# Altium PCB KL25_2.PcbDoc
Units mm, origin at the board's own origin, x right, y up, seen from the top; angles counter-clockwise.
Board outline 152.4 x 101.6 mm, 2 copper layers (Top Layer, Bottom Layer); 50 components, 86 nets, 226 pads, 32 vias.
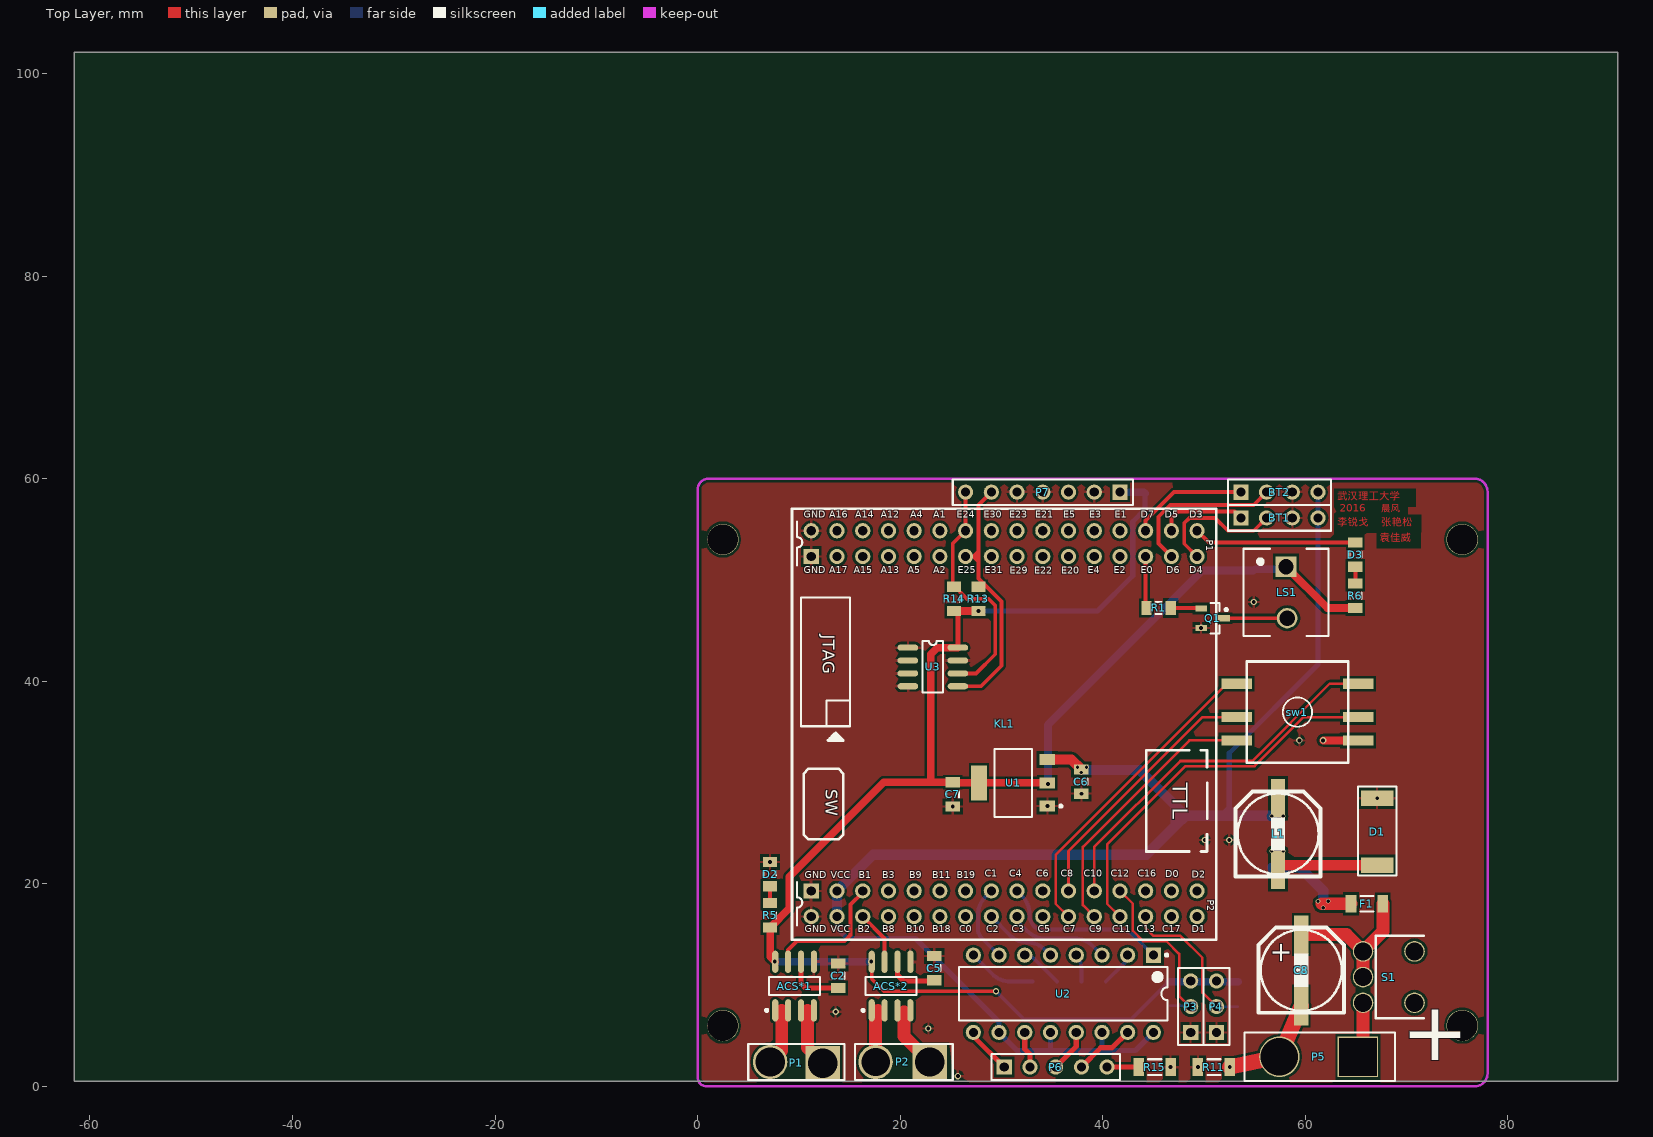
[diagram p0: Top Layer view]
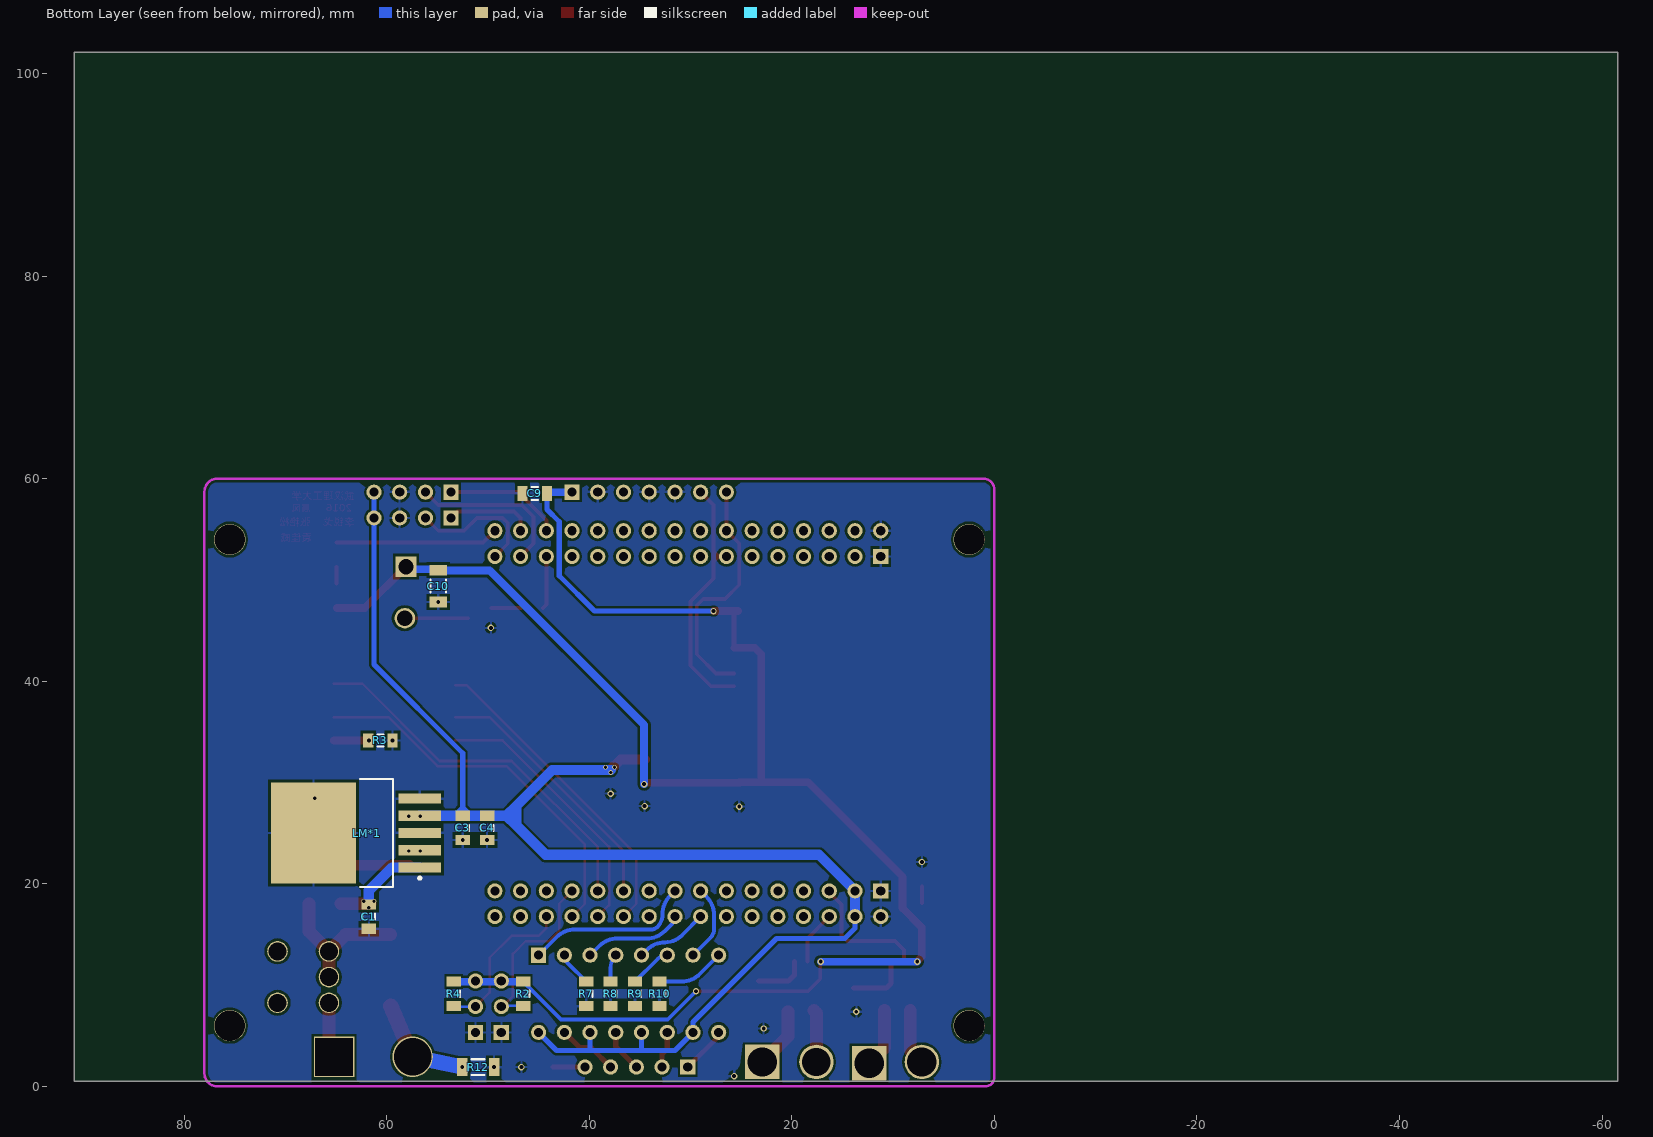
[diagram p1: Bottom Layer view, seen from below]

## Layer stack, top to bottom
Top Layer: signal copper 0.0356
Dielectric: dielectric 0.32, FR-4, Dk 4.8
Bottom Layer: signal copper 0.0356

## Board outline
-61.548,0.508 90.852,0.508 90.852,102.108 -61.548,102.108

## Design rules (kind name [scope] priority, off if disabled: settings)
Clearance [All] p1: gap=0.254
PolygonConnect [All] p1: connectstyle=Relief reliefconductorwidth=0.254 reliefentries=4 polygonreliefangle="90 Angle" airgapwidth=0.254
RoutingVias [All] p1: holewidth=0.711 width=1.27 viastyle="Through Hole" minholewidth=0.711 minwidth=1.27 maxholewidth=0.711 maxwidth=1.27
SolderMaskExpansion [All] p1: expansion=0.102
Width [All] p1: maxlimit=1.524 minlimit=0.152 preferedwidth=1.016 minimp=50.000000 maximp=50.000000 favimp=50.000000
28 further rules are at their usual default settings.

## Components (designator, comment, footprint, x,y, rotation, side; value= is the part's Value field where it differs from the comment)
ACS*1 "ACS712 AMPSENSOR" "SOIC1-8N ACS712" 9.572,9.906 r90 top
ACS*2 "ACS712 AMPSENSOR" "SOIC1-8N ACS712" 19.097,9.906 r90 top
BT1 "Header 4" HDR1X4 53.641,56.134 r0 top
BT2 "Header 4" HDR1X4 53.641,58.674 r0 top
C1 "Cap" C2012 61.769,16.764 r90 bottom
C2 "Cap" C2012 13.89,10.922 r270 top
C3 "Cap" C2012 52.498,25.527 r90 bottom
C4 "Cap" C2012 50.085,25.527 r90 bottom
C5 "Cap" C2012 23.368,11.684 r270 top
C6 "Cap" C2012 37.893,30.099 r90 top
C7 "Cap" C2012 25.193,28.829 r90 top
C8 "Cap Pol1" SMD-EC-F8 59.61,14.986 r270 top
C9 "100nF" C2012 45.386,58.547 r180 bottom
C10 "Cap Pol1" 1206(2) 54.911,49.403 r270 bottom
D1 "1SS355" SK54 67.103,25.146 r270 top
D2 "POWER" R2012 7.159,20.955 r90 top
D3 "POWER" R2012 64.944,52.508 r90 top
F1 "1.5A" 1206(2) 66.087,18.034 r0 top
KL1 "KL25Z系统板 V2.0" "KL25 V2.0系统板" 29.638,37.592 r270 top
L1 "33uH" SMD-EC-F8 57.324,28.448 r270 top
LM*1 "lm2596" lm2596 63.039,25.019 r0 bottom
LS1 "Buzzer" ABSM-1574 58.34,53.975 r270 top
P1 "Header 2" HDR1X2#1 10.715,2.54 r180 top
P2 "Header 2" HDR1X2#2 21.51,2.54 r180 top
P3 "Header 3" HDR1X3 48.688,5.334 r90 top
P4 "Header 3" HDR1X3 51.228,5.334 r90 top
P5 "Header 2" HDR1X2#3 62.785,2.921 r180 top
P6 "Header 5" HDR1X5 30.273,1.905 r0 top
P7 "Header 7" HDR1X7 41.703,58.674 r180 top
Q1 "QNPN" SOT23_N 50.847,46.228 r0 top
R1 "Res2" R2012 45.513,47.244 r180 top
R2 "Res2" R2012 46.529,9.144 r270 bottom
R3 "10k" R2012 60.626,34.163 r0 bottom
R4 "Res2" R2012 53.387,9.144 r270 bottom
R5 "2K" R2012 7.159,16.891 r270 top
R6 "2K" R2012 64.944,48.444 r270 top
R7 "Res2" R2012 40.306,9.144 r270 bottom
R8 "Res2" R2012 37.893,9.144 r270 bottom
R9 "Res2" R2012 35.48,9.144 r270 bottom
R10 "Res2" R2012 33.067,9.144 r270 bottom
R11 "Res2" 1206(2) 50.974,1.905 r0 top
R12 "Res2" 1206(2) 50.974,1.905 r0 bottom
R13 "Res2" R2012 27.733,48.133 r270 top
R14 "Res2" R2012 25.32,48.133 r270 top
R15 "Res2" 1206(2) 45.132,1.905 r180 top
S1 "small switch" "small switch" 65.706,13.335 r0 top
sw1 "SW-5" SW-5 59.229,36.957 r0 top
U1 "REG1117" SOT223 31.162,29.972 r90 top
U2 "TLP521-4" DIP-16 36.115,9.144 r270 top
U3 "AT24C02" IR2104 23.161,41.021 r90 top

## Footprints (in the part's own frame and the unit in brackets; to place one, negate y for a bottom-side part, rotate by r counter-clockwise, add the part's x,y. Pads: shape width x height; smd on the part's side, far side on the other; paste and mask are expansions set on the pad)
1206(2) [mm]
  rect 1.05x1.75 smd: 1(-1.575,0) 2(1.575,0)
  silkscreen extent -0.65,-0.77 0.65,0.77, body extent -1.6,-0.8 1.6,0.8, height 1.6
ABSM-1574 [mil] "Magnetic Transducer Buzzer"
  rect 80x80 hole 60: 1A(104.33,-9.45)
  round 80 hole 60: 2A(305,-5)
  silkscreen extent 35,-175 375,155
C2012 [mm] "Chip Capacitor, 2-Leads, Body 2.0x1.2mm, IPC Low Density"
  rect 1x1.45 smd: 1(-1.2,0) 2(1.2,0)
  silkscreen extent -0.3,-0.63 0.3,0.63, body extent -0.98,-0.6 1.02,0.6, height 0.5
DIP-16 [mm] "DIP; 16 Leads; Row Spacing 7.62 mm; Pitch 2.54 mm"
  rect 1.5x1.5 hole 0.9: 1(-3.81,8.89)
  round 1.5 hole 0.9: 2(-3.81,6.35) 3(-3.81,3.81) 4(-3.81,1.27) 5(-3.81,-1.27) 6(-3.81,-3.81) 7(-3.81,-6.35) 8(-3.81,-8.89) 9(3.81,-8.89) 10(3.81,-6.35) 11(3.81,-3.81) 12(3.81,-1.27) 13(3.81,1.27) 14(3.81,3.81) 15(3.81,6.35) 16(3.81,8.89)
  silkscreen extent -3.93,-10.3 2.65,10.32, body extent -3.6,-10.28 3.6,10.28, height 5.08
HDR1X2#1 [mm] "Connector; Header; 2 Position"
  rect 3.4x3.4 hole 2.9: 1(-1.651,0.254)
  round 3.4 hole 2.9: 2(3.556,0.127)
  silkscreen extent -3.81,-1.65 5.71,1.91
HDR1X2#2 [mm] "Connector; Header; 2 Position"
  rect 3.4x3.4 hole 2.9: 1(-1.397,0.127)
  round 3.4 hole 2.8: 2(3.937,0.127)
  silkscreen extent -3.68,-1.65 5.97,1.91
HDR1X2#3 [mm] "Connector; Header; 2 Position"
  rect 4x4 hole 3.7 square: 1(-2.413,0)
  round 4 hole 3.7: 2(5.334,0)
  silkscreen extent -6.1,-2.41 8.76,2.41
HDR1X3 [mm] "Connector; Header; 3 Position"
  rect 1.5x1.5 hole 0.9: 1(0,0)
  round 1.5 hole 0.9: 2(2.54,0) 3(5.08,0)
  silkscreen extent -1.27,-1.27 6.35,1.27, body extent -1.27,-1.27 6.35,1.27, height 7.58
HDR1X4 [mm] "Connector; Header; 4 Position"
  rect 1.5x1.5 hole 0.9: 1(0,0)
  round 1.5 hole 0.9: 2(2.54,0) 3(5.08,0) 4(7.62,0)
  silkscreen extent -1.27,-1.27 8.89,1.27
HDR1X5 [mm] "Connector; Header; 5 Position"
  rect 1.5x1.5 hole 0.9: 1(0,0)
  round 1.5 hole 0.9: 2(2.54,0) 3(5.08,0) 4(7.62,0) 5(10.16,0)
  silkscreen extent -1.27,-1.27 11.43,1.27, body extent -1.27,-1.27 11.43,1.27, height 7.58
HDR1X7 [mm] "Connector; Header; 7 Position"
  rect 1.5x1.5 hole 0.9: 1(0,0)
  round 1.5 hole 0.9: 2(2.54,0) 3(5.08,0) 4(7.62,0) 5(10.16,0) 6(12.7,0) 7(15.24,0)
  silkscreen extent -1.27,-1.27 16.51,1.27
IR2104 [mm]
  oval 0.6x2.032 smd: 1(2.298,2.394) 2(1.028,2.394) 3(-0.242,2.394) 4(-1.512,2.394) 5(-1.512,-2.534) 6(-0.242,-2.534) 7(1.028,-2.534) 8(2.298,-2.534)
  silkscreen extent -2.11,-1.09 2.94,0.95
"KL25 V2.0系统板" [mm]
  rect 1.5x1.5 hole 0.9: 101(-14.732,-18.415) 201(18.288,-18.415)
  round 1.5 hole 0.9: 102(-17.272,-18.415) 103(-14.732,-15.875) 104(-17.272,-15.875) 105(-14.732,-13.335) 106(-17.272,-13.335) 107(-14.732,-10.795) 108(-17.272,-10.795) 109(-14.732,-8.255) 110(-17.272,-8.255) 111(-14.732,-5.715) 112(-17.272,-5.715) 113(-14.732,-3.175) 114(-17.272,-3.175) 115(-14.732,-0.635) 116(-17.272,-0.635) 117(-14.732,1.905) 118(-17.272,1.905) 119(-14.732,4.445) 120(-17.272,4.445) 121(-14.732,6.985) 122(-17.272,6.985) 123(-14.732,9.525) 124(-17.272,9.525) 125(-14.732,12.065) 126(-17.272,12.065) 127(-14.732,14.605) 128(-17.272,14.605) 129(-14.732,17.145) 130(-17.272,17.145) 131(-14.732,19.685) 132(-17.272,19.685) 202(20.828,-18.415) 203(18.288,-15.875) 204(20.828,-15.875) 205(18.288,-13.335) 206(20.828,-13.335) 207(18.288,-10.795) 208(20.828,-10.795) 209(18.288,-8.255) 210(20.828,-8.255) 211(18.288,-5.715) 212(20.828,-5.715) 213(18.288,-3.175) 214(20.828,-3.175) 215(18.288,-0.635) 216(20.828,-0.635) 217(18.288,1.905) 218(20.828,1.905) 219(18.288,4.445) 220(20.828,4.445) 221(18.288,6.985) 222(20.828,6.985) 223(18.288,9.525) 224(20.828,9.525) 225(18.288,12.065) 226(20.828,12.065) 227(18.288,14.605) 228(20.828,14.605) 229(18.288,17.145) 230(20.828,17.145) 231(18.288,19.685) 232(20.828,19.685)
  silkscreen extent -19.43,-20.32 23.11,21.59
lm2596 [mm]
  rect 4.2x1 smd: 1(-6.3,3.4) 2(-6.3,1.7) 3(-6.3,0) 4(-6.3,-1.7) 5(-6.3,-3.4)
  rect 8.4x10 smd: 6(4.2,0)
  silkscreen extent -6.42,-5.35 -0.4,5.35, body extent -3.65,-5.32 6,5.33, height 4.83
R2012 [mm] "Chip Resistor, 2-Leads, Body 2.0x1.2mm, IPC Low Density"
  rect 1x1.4 smd: 1(-1.2,0) 2(1.2,0)
  silkscreen extent -0.3,-0.6 0.3,0.6, body extent -0.98,-0.6 1.02,0.6, height 0.5
SK54 [mm]
  rect 1.52x3.18 smd: 1(-3.305,0) 2(3.305,0)
  silkscreen extent -4.44,-1.91 4.32,1.91
"small switch" [mil]
  round 80 hole 70: 0(200,-200) 0(200,0) 1(0,0) 2(0,-100) 3(0,-200)
  silkscreen extent 50,-260 235,60
SMD-EC-F8 [mm]
  rect 3.8x1.4 smd: 1(0,0) 2(7.051,0)
  silkscreen extent -0.69,-4.22 7.71,4.2
"SOIC1-8N ACS712" [mm]
  oval 2.2x0.6 smd: 1(-2.4,1.905) 2(-2.4,0.635) 3(-2.4,-0.635) 4(-2.4,-1.905) 5(2.4,-1.905) 6(2.4,-0.635) 7(2.4,0.635) 8(2.4,1.905)
  silkscreen extent -2.52,-2.5 0.9,2.88, body extent -2,-2.5 2,2.5, height 1.75
SOT23_N [mm] "SOT23, 3-Leads, Body 2.9x1.3mm, Pitch 0.95mm, Lead Span 2.3mm - Reverse Pinning, IPC Medium Density"
  rect 1.15x0.6 smd: 1(1.125,0) 2(-1.125,-0.95) 3(-1.125,0.95)
  silkscreen extent -0.2,-1.5 1.48,1.5, body extent -0.7,-1.5 0.7,1.5, height 1.1
SOT223 [mm] "SOT-223/SC-73; 4 Leads; Body 6.7 x 7.3 mm, inc. leads (LxW max)"
  rect 1.1x1.55 smd: 1(-2.3,-3.375) 2(0,-3.375) 3(2.3,-3.375)
  rect 3.45x1.55 smd: 4(0,3.375)
  silkscreen extent -3.35,-4.83 3.35,1.85, body extent -3.25,-3.47 3.25,3.49, height 1.66
SW-5 [mm]
  rect 3x1 smd: 1(-6,2.8) 2(-6,-0.5) 3(-6,-2.8) 4(6,-2.8) 5(6,-0.5) 6(6,2.8)
  silkscreen extent -5,-5 5,5

## Part data
BT1 BT2: "Header, 4-Pin"
C1 C3 C4: "Capacitor"
C2 C5 C6 C7: "贴片电容"
C8 C10: "Polarized Capacitor (Radial)"
C9: library part Cap, "Capacitor"
D1: library part "Diode 1N4148", "High Conductance Fast Diode"
D2 D3: library part LED, "Typical INFRARED GaAs LED"
F1: library part "Fuse 1", "Fuse"
L1: library part Inductor, "Inductor"
LS1: "Magnetic Transducer Buzzer"
P1 P2 P5: "Header, 2-Pin"
P3 P4: "Header, 3-Pin"
P6: "Header, 5-Pin"
P7: "Header, 7-Pin"
Q1: "NPN Bipolar Transistor"
R1 R2 R4 R7 R8 R9 R10 R11 R12 R13 R14 R15: "Resistor"
R3: library part Res, "Resistor of led"
R5 R6: library part Res, "Resistor"
U1: "800mA and 1A Low Dropout Positive Regulator 2.85V, 3.3V, 5V, and Adjustable"

## Free pads (board coordinates)
  round 3.1 hole 3: 4(2.5,54) 5(2.5,6) 6(75.5,54) 7(75.5,6)

## Via types
v1: diameter 0.635, hole 0.381, Top Layer to Bottom Layer, 22 vias
v2: diameter 0.457, hole 0.33, Top Layer to Bottom Layer, 10 vias

## Nets (pads, with @x,y where several pads share a name; then routed paths per layer and width w, separated by ;. In a path a pad name is that pad's centre, name@x,y a point inside that pad or via, vN(x,y) a via of type N, cw(c..) or ccw(c..) an arc to the next point about the centre after c; other vN are vias at no path point)
3.3V: ACS*1.8 ACS*2.8 C7.2 C9.2 C10.1 LS1.1A P3.3 P4.3 P7.1 R2.1 R4.1 R5.2 R6.2 R13.2 R14.2 U1.2 U1.4 U3.8 | length 182.6
  Top Layer w0.381: ACS*2.8 17.192,10.621 18.415,9.398 v1(29.464,9.398)
  Top Layer w0.508: U3.8 R14.2@25.695,46.558
  Top Layer w0.762: ACS*1.8 7.159,12.814 R5.2 9.064,17.596 9.064,20.701 18.392,30.029 C7.2 C7.2@25.079,30.029 ; 23.034,30.029 23.034,42.672 23.681,43.319 U3.8 ; C7.2@25.066,30.042 C7.2@25.079,30.029 ; R14.2 v1(27.733,46.933) ; U1.2 U1.4 25.136,29.972 C7.2@25.079,30.029 ; LS1.1A 62.181,47.244 R6.2
  Bottom Layer w0.381: v1(29.464,9.398) 32.258,6.604 42.789,6.604 R2.1
  Bottom Layer w0.508: v1(27.733,46.933) 39.487,46.933 42.973,50.419 42.973,55.753 44.186,56.966 C9.2
  Bottom Layer w0.762: v1(7.62,12.319) v1(17.145,12.319) ; v1(34.591,29.845) 34.591,35.687 49.843,50.939 54.872,50.939 C10.1 ; P7.1 44.059,58.674 C9.2 ; R2.1 R4.1 ; C10.1@55.131,51.071 LS1.1A@57.973,51.071
5V: BT1.4 BT2.4 C3.2 C4.2 C6.2 KL1.203 KL1.204 L1.1 LM*1.4 U1.3 U2.10 U2.12 U2.14 U2.16 | length 146.3
  Top Layer w1.016: U1.3 36.92,32.272 C6.2
  Bottom Layer w0.508: KL1.204 13.763,15.621 14.779,14.605 21.51,14.605 29.765,6.35 U2.10 31.543,3.556 43.227,3.556 U2.16 ; 34.845,3.683 U2.12 ; 39.925,3.683 U2.14 ; 51.658,26.719 52.498,27.559 ; C3.2 52.498,27.559 ; 53.338,26.719 52.498,27.559 ; BT2.4 BT1.4 61.261,41.656 52.498,32.893 52.498,27.559
  Bottom Layer w1.016: KL1.204 KL1.203 17.319,22.86 44.313,22.86 47.221,25.768 ; 37.893,31.242 43.665,31.242 47.221,27.686 ; 48.315,26.719 51.658,26.719 53.338,26.719 LM*1.4 ; 47.221,25.768 48.18,26.727 47.221,27.686 ; 47.221,25.768 47.221,27.686
  other v2: 56.689,26.67 57.832,26.67 37.893,30.988 37.512,31.496 38.401,31.496
12V: C1.2 F1.1 LM*1.1 | length 10.2
  Top Layer w1.27: 61.642,18.034 F1.1
  Bottom Layer w1.016: LM*1.1 59.454,21.619 61.769,19.304 C1.2
  other v2: 61.769,17.653 61.261,18.288 62.277,18.288
ADC1: KL1.121
ADC2: KL1.120
ADC3: KL1.119
ADC4: KL1.118
ADC5: ACS*1.7 KL1.205 | length 12.8
  Top Layer w0.381: ACS*1.7 8.937,13.462 9.826,14.351 14.525,14.351 15.108,14.934 15.108,17.959 16.303,19.153 KL1.205
ADC6: ACS*2.7 KL1.206 | length 5.4
  Top Layer w0.381: KL1.206 18.462,14.605 ACS*2.7
ADC7: KL1.207
"BT RXD": BT1.1 KL1.130 | length 8.7
  Top Layer w0.381: KL1.130 46.783,56.134 47.418,56.769 53.006,56.769 BT1.1
"BT TXD": BT1.2 KL1.131 | length 13.3
  Top Layer w0.381: KL1.131 49.323,52.308 48.053,53.578 48.053,55.626 48.561,56.134 51.101,56.134 52.371,54.864 54.911,54.864 BT1.2
BZ: KL1.127 R1.2 | length 5.2
  Top Layer w0.381: KL1.127 44.243,47.568 R1.2@44.567,47.244
EGND: C8.2 P5.2 R11.2 R12.2 | length 15.5
  Top Layer w1.524: v1(52.549,1.905) P5.2 C8.2
  Bottom Layer w1.524: v1(52.549,1.905) P5.2
GND: ACS*1.5 ACS*2.5 BT1.3 BT2.3 C1.1 C2.1 C3.1 C4.1 C5.1 C6.1 C7.1 C9.1 C10.2 D1.1 D2.2 KL1.101 KL1.102 KL1.201 KL1.202 LM*1.3 LM*1.5 LM*1.6 P3.1 P4.1 P7.2 P7.4 P7.5 Q1.2 R3.1 R7.2 R8.2 R9.2 R10.2 R11.1 R12.1 R15.1 U1.1 U3.1 U3.2 U3.3 U3.4 U3.7
  other v1: 25.701,1.016 46.707,1.905 49.399,1.905 22.78,5.715 13.636,7.366 7.159,22.155 50.085,24.327 52.498,24.327 25.193,27.629 34.537,27.672 67.103,28.451 37.893,28.899 59.426,34.163 49.722,45.278 54.911,47.828
I2C0_SCL: KL1.114 P7.7 R14.1 U3.6 | length 24
  Top Layer w0.381: U3.6 27.491,40.779 29.384,42.672 29.384,47.498 28.749,48.133 26.59,48.133 25.193,49.53 25.193,53.594 KL1.114 P7.7
I2C0_SDA: KL1.113 P7.6 R13.1 U3.5 | length 26.5
  Top Layer w0.381: U3.5 27.999,39.509 30.019,41.529 30.019,47.879 27.733,50.165 27.733,51.816 ; KL1.113 27.225,52.324 ; P7.6 27.733,57.404 27.733,52.832 ; 27.225,52.324 27.733,51.816 ; 27.225,52.324 27.733,52.324 ; 27.225,52.324 27.733,52.832 ; 27.733,51.816 27.733,52.324 ; 27.733,52.324 27.733,52.832
KEY0: KL1.222 sw1.1 | length 31.4
  Top Layer w0.254: KL1.222 35.353,18.034 35.353,22.86 52.086,39.593 sw1.1@53.229,39.593
KEY1: KL1.221 sw1.2 | length 26
  Top Layer w0.254: KL1.221 36.623,23.241 49.839,36.457 sw1.2
KEY2: KL1.224 sw1.3 | length 26.9
  Top Layer w0.254: KL1.224 38.032,17.895 38.032,23.634 48.555,34.157 sw1.3
KEY3: KL1.226 sw1.5 | length 37.6
  Top Layer w0.254: KL1.226 40.433,18.034 40.433,23.876 48.18,31.623 54.994,31.623 59.828,36.457 sw1.5
KEY4: KL1.223 sw1.6 | length 37.1
  Top Layer w0.254: KL1.223 39.163,23.622 47.672,32.131 54.784,32.131 62.41,39.757 sw1.6
LED: D3.2 KL1.132 | length 16.1
  Top Layer w0.381: KL1.132 50.479,53.708 D3.2
MOTOR1: P6.4 U2.15 | length 6
  Top Layer w0.508: P6.4 39.798,3.81 40.917,3.81 42.441,5.334 U2.15
MOTOR2: P6.3 U2.13 | length 4.3
  Top Layer w0.508: P6.3 37.385,3.937 U2.13
MOTOR3: P6.2 U2.11 | length 3.6
  Top Layer w0.508: U2.11 32.305,3.683 32.813,3.175 P6.2
MOTOR4: P6.1 U2.9 | length 4.7
  Top Layer w0.508: U2.9 27.225,4.953 P6.1
MOTOR_GND: P6.5 R15.2 | length 3.1
  Top Layer w0.508: P6.5 R15.2
NetACS*1_1: ACS*1.1 ACS*1.2 P1.2 | length 5.6
  Top Layer w1.27: P1.2 8.302,3.556 8.302,7.493
NetACS*1_3: ACS*1.3 ACS*1.4 P1.1 | length 5.8
  Top Layer w1.27: 10.842,7.493 10.842,3.81 P1.1
NetACS*1_6: ACS*1.6 C2.2 | length 6
  Top Layer w0.508: ACS*1.6 10.207,10.16 10.645,9.722 C2.2
NetACS*2_1: ACS*2.1 ACS*2.2 P2.2 | length 5.2
  Top Layer w1.27: P2.2 17.573,7.239 17.827,7.493
NetACS*2_3: ACS*2.3 ACS*2.4 P2.1 | length 6
  Top Layer w1.27: 20.367,7.366 20.367,4.953 P2.1
NetACS*2_6: ACS*2.6 C5.2 | length 5.1
  Top Layer w0.508: ACS*2.6 19.732,11.002 20.32,10.414 C5.2@23.288,10.414
NetC8_1: C8.1 F1.2 S1.1 S1.2 | length 14.8
  Top Layer w1.27: C8.1 64.055,14.986 S1.1 ; S1.2 S1.1 ; F1.2 67.662,15.291 S1.1
NetD1_2: D1.2 L1.2 LM*1.2 | length 9.3
  Top Layer w1.016: L1.2@57.768,21.841 D1.2
  other v2: 56.689,23.241 57.832,23.241
NetD2_1: D2.1 R5.1 | length 1.7
  Top Layer w0.381: R5.1 D2.1
NetD3_1: D3.1 R6.1 | length 1.7
  Top Layer w0.381: R6.1 D3.1
NetLS1_2: LS1.2A Q1.1 | length 6.2
  Top Layer w0.381: Q1.1 LS1.2A
NetQ1_2: Q1.3 R1.1 | length 2.9
  Top Layer w0.381: R1.1 Q1.3@49.656,47.244
NetR3_2: R3.2 sw1.4 | length 3.5
  Top Layer w0.762: v1(61.769,34.163) sw1.4
NetR7_1: R7.1 U2.2 | length 3.5
  Bottom Layer w0.381: R7.1 42.146,12.184 ccw(c41.376,12.954) U2.2
NetR8_1: R8.1 U2.4 | length 2.7
  Bottom Layer w0.381: U2.4 cw(c36.159,11.728) 37.893,11.728 R8.1
NetR9_1: R9.1 U2.6 | length 4.2
  Bottom Layer w0.381: U2.6 cw(c32.305,11.59) 33.27,12.554 R9.1
NetR10_1: R10.1 U2.8 | length 6.8
  Bottom Layer w0.381: U2.8 29.091,11.088 ccw(c30.887,12.884) 30.887,10.344 R10.1
OLED0: KL1.126
OLED1: KL1.125
OLED2: KL1.124
OLED3: KL1.123
OLED4: KL1.122
PTA1: KL1.112
PTA2: KL1.111
PTA4: KL1.110
PTA5: KL1.109
PTA12: KL1.108
PTA13: KL1.107
PTA14: KL1.106
PTA15: KL1.105
PTA16: KL1.104
PTA17: KL1.103
PTB8: KL1.208
PTB9: KL1.209
PTB10: KL1.210
PTB11: KL1.211
PTB18: KL1.212
PTB19: KL1.213
PTC0: KL1.214
PTC1: KL1.215 U2.7 | length 7.6
  Bottom Layer w0.381: KL1.215 28.43,18.731 ccw(c30.226,16.935) 27.686,16.935 27.686,15.494 ccw(c28.799,15.494) 28.012,14.707 U2.7
PTC2: KL1.216 U2.5 | length 7.2
  Bottom Layer w0.381: KL1.216 30.85,14.917 ccw(c32.523,16.59) 32.523,14.224 cw(c32.523,11.684) 34.319,13.48 U2.5
PTC3: KL1.218 U2.3 | length 10.5
  Bottom Layer w0.381: KL1.218@31.543,16.226 KL1.218 ccw(c32.576,16.764) 31.846,16.033 32.53,15.349 ccw(c34.326,17.145) 34.326,14.605 37.222,14.605 cw(c37.222,12.065) 39.018,13.861 U2.3
PTC4: KL1.217 U2.1 | length 16.8
  Bottom Layer w0.381: KL1.217 32.022,18.825 cw(c30.226,17.029) 32.766,17.029 32.766,16.974 ccw(c34.5,16.974) 33.274,15.748 ccw(c33.887,16.361) 33.887,15.494 41.413,15.494 cw(c41.413,12.954) 43.209,14.75 U2.1
PTC5: KL1.220
PTC6: KL1.219
PTC12: KL1.225 P3.2 R2.2 | length 17.5
  Top Layer w0.254: KL1.225 42.973,18.034 42.973,15.367 43.989,14.351 46.275,14.351 47.545,13.081 47.545,8.914 48.307,8.152 P3.2@48.307,7.874
  Bottom Layer w0.254: R2.2@46.656,7.944 P3.2@48.618,7.944
PTC13: KL1.228 P4.2 R4.2 | length 15.4
  Top Layer w0.254: KL1.228 44.243,15.621 45.005,14.859 47.672,14.859 49.831,12.7 49.831,9.271 P4.2
  Bottom Layer w0.254: P4.2 R4.2@53.317,7.874
PTC16: KL1.227
PTC17: KL1.230
PTD0: KL1.229
PTD1: KL1.232
PTD2: KL1.231
PTD6: BT2.2 KL1.129 | length 16.1
  Top Layer w0.381: KL1.129 45.513,53.594 45.513,56.252 46.665,57.404 54.911,57.404 BT2.2
PTD7: BT2.1 KL1.128 | length 11.6
  Top Layer w0.381: KL1.128 44.243,55.88 47.037,58.674 BT2.1
PTE29: KL1.117
PTE30: KL1.116
PTE31: KL1.115
VBAT: P5.1 S1.3 | length 4.8
  Top Layer w1.27: P5.1@65.706,3.429 S1.3
pads on no net: P7.3 S1.0

## Polygon pours and split planes (outlines as drawn)
GND on Bottom Layer "Top Layer-GND" (solid, remove dead copper, pour order 8): 3.302,60 0,60 0,56.896 0,0 20.32,0 78,0 78,31.623 78,60 47.625,60
GND on Top Layer "Top Layer-GND" (solid, remove dead copper, pour order 10): 0,58.674 0,60 1.778,60 78,60 78,45.085 78,0 64.008,0 0,0 0,1.778

## Keep-outs
Keep-Out Layer:
  lines w0.254: 0,0.889 ccw(c0.889,0.889) 0.889,0 76.581,0 76.73,0 ccw(c76.73,1.27) 78,1.27 78,1.419 78,58.525 78,58.73 ccw(c76.73,58.73) 76.73,60 76.525,60 1.072,60 ccw(c1.072,58.928) 0,58.928 0,0.889

## Other copper
Top Layer:
  text "武汉理工大学" at 63.166,57.658 h1.27
  text "2016" at 63.42,56.515 h1.27 r0.25
  text "晨风" at 67.484,56.515 h1.2
  text "李锐戈" at 63.166,55.118 h1.27
  text "张艳松" at 67.484,55.118 h1.27
  text "袁佳威" at 67.357,53.594 h1.27

## Silkscreen, mask and mechanical layers (free items; w line width, h text height)
Top Overlay:
  text "+" at 69.469,0.635 h10

## Text inside footprints (layer, text, board x,y; h text height)
C8: Top Overlay "+" at 56.792,14.346 h2 r270
KL1: Top Overlay "D2" at 48.815,20.333 h1.14; Top Overlay "D1" at 48.815,14.996 h1.14; Top Overlay "P2" at 50.085,18.415 h1.14 r270; Top Overlay "P1" at 49.958,53.975 h1.14 r270; Top Overlay "C9" at 38.655,14.986 h1.14; Top Overlay "GND" at 10.588,14.986 h1.14; Top Overlay "C3" at 31.035,14.986 h1.14; Top Overlay "E0" at 43.735,50.419 h1.14; Top Overlay "D7" at 43.735,55.88 h1.14; Top Overlay "D6" at 46.275,50.419 h1.14; Top Overlay "D5" at 46.148,55.88 h1.14; Top Overlay "D4" at 48.561,50.419 h1.14; Top Overlay "E1" at 41.195,55.88 h1.14; Top Overlay "E3" at 38.655,55.88 h1.14; Top Overlay "E5" at 36.115,55.88 h1.14; Top Overlay "GND" at 10.461,50.419 h1.14; Top Overlay "A2" at 23.288,50.419 h1.14; Top Overlay "A5" at 20.748,50.419 h1.14; Top Overlay "A15" at 15.414,50.419 h1.14; Top Overlay "A14" at 15.541,55.88 h1.14; Top Overlay "A13" at 18.081,50.419 h1.14; Top Overlay "VCC" at 13.128,14.986 h1.14; Top Overlay "B2" at 15.795,14.996 h1.14; Top Overlay "B8" at 18.208,14.996 h1.14; Top Overlay "B10" at 20.621,14.996 h1.14; Top Overlay "B18" at 23.161,14.996 h1.14; Top Overlay "C0" at 25.828,14.986 h1.14; Top Overlay "C2" at 28.495,14.986 h1.14; Top Overlay "C5" at 33.575,14.986 h1.14; Top Overlay "C7" at 36.115,14.986 h1.14; Top Overlay "C11" at 40.941,14.986 h1.14; Top Overlay "C13" at 43.354,14.986 h1.14; Top Overlay "C17" at 45.894,14.986 h1.14; Top Overlay "D3" at 48.561,55.88 h1.14; Top Overlay "E20" at 35.901,50.378 h1.14; Top Overlay "E21" at 33.321,55.88 h1.14; Top Overlay "E22" at 33.234,50.378 h1.14; Top Overlay "E29" at 30.821,50.378 h1.14; Top Overlay "E23" at 30.781,55.88 h1.14; Top Overlay "E30" at 28.241,55.88 h1.14; Top Overlay "E31" at 28.368,50.419 h1.14; Top Overlay "E24" at 25.574,55.88 h1.14; Top Overlay "E25" at 25.701,50.419 h1.14; Top Overlay "A1" at 23.288,55.88 h1.14; Top Overlay "GND" at 10.461,55.88 h1.14; Top Overlay "A4" at 21.002,55.88 h1.14; Top Overlay "A12" at 18.081,55.88 h1.14; Top Overlay "A17" at 13.001,50.419 h1.14; Top Overlay "A16" at 13.001,55.88 h1.14; Top Overlay "E4" at 38.528,50.419 h1.14; Top Overlay "E2" at 41.068,50.419 h1.14; Top Overlay "C1" at 28.368,20.447 h1.14; Top Overlay "B19" at 25.574,20.32 h1.14; Top Overlay "B11" at 23.161,20.32 h1.14; Top Overlay "B9" at 20.875,20.32 h1.14; Top Overlay "B3" at 18.208,20.32 h1.14; Top Overlay "B1" at 15.922,20.32 h1.14; Top Overlay "VCC" at 13.128,20.32 h1.14; Top Overlay "GND" at 10.588,20.32 h1.14; Top Overlay "C4" at 30.781,20.447 h1.14; Top Overlay "C6" at 33.448,20.447 h1.14; Top Overlay "C8" at 35.861,20.447 h1.14; Top Overlay "C10" at 38.147,20.447 h1.14; Top Overlay "C12" at 40.814,20.447 h1.14; Top Overlay "C16" at 43.481,20.447 h1.14; Top Overlay "D0" at 46.188,20.406 h1.14; Top Overlay "JTAG" at 11.985,44.577 h2.03 r270; Top Overlay "SW" at 12.239,29.337 h2.03 r270; Top Overlay "TTL" at 46.402,29.972 h2.54 r270